# EAGLE board latchbox-lite (EAGLE 6.6.0)
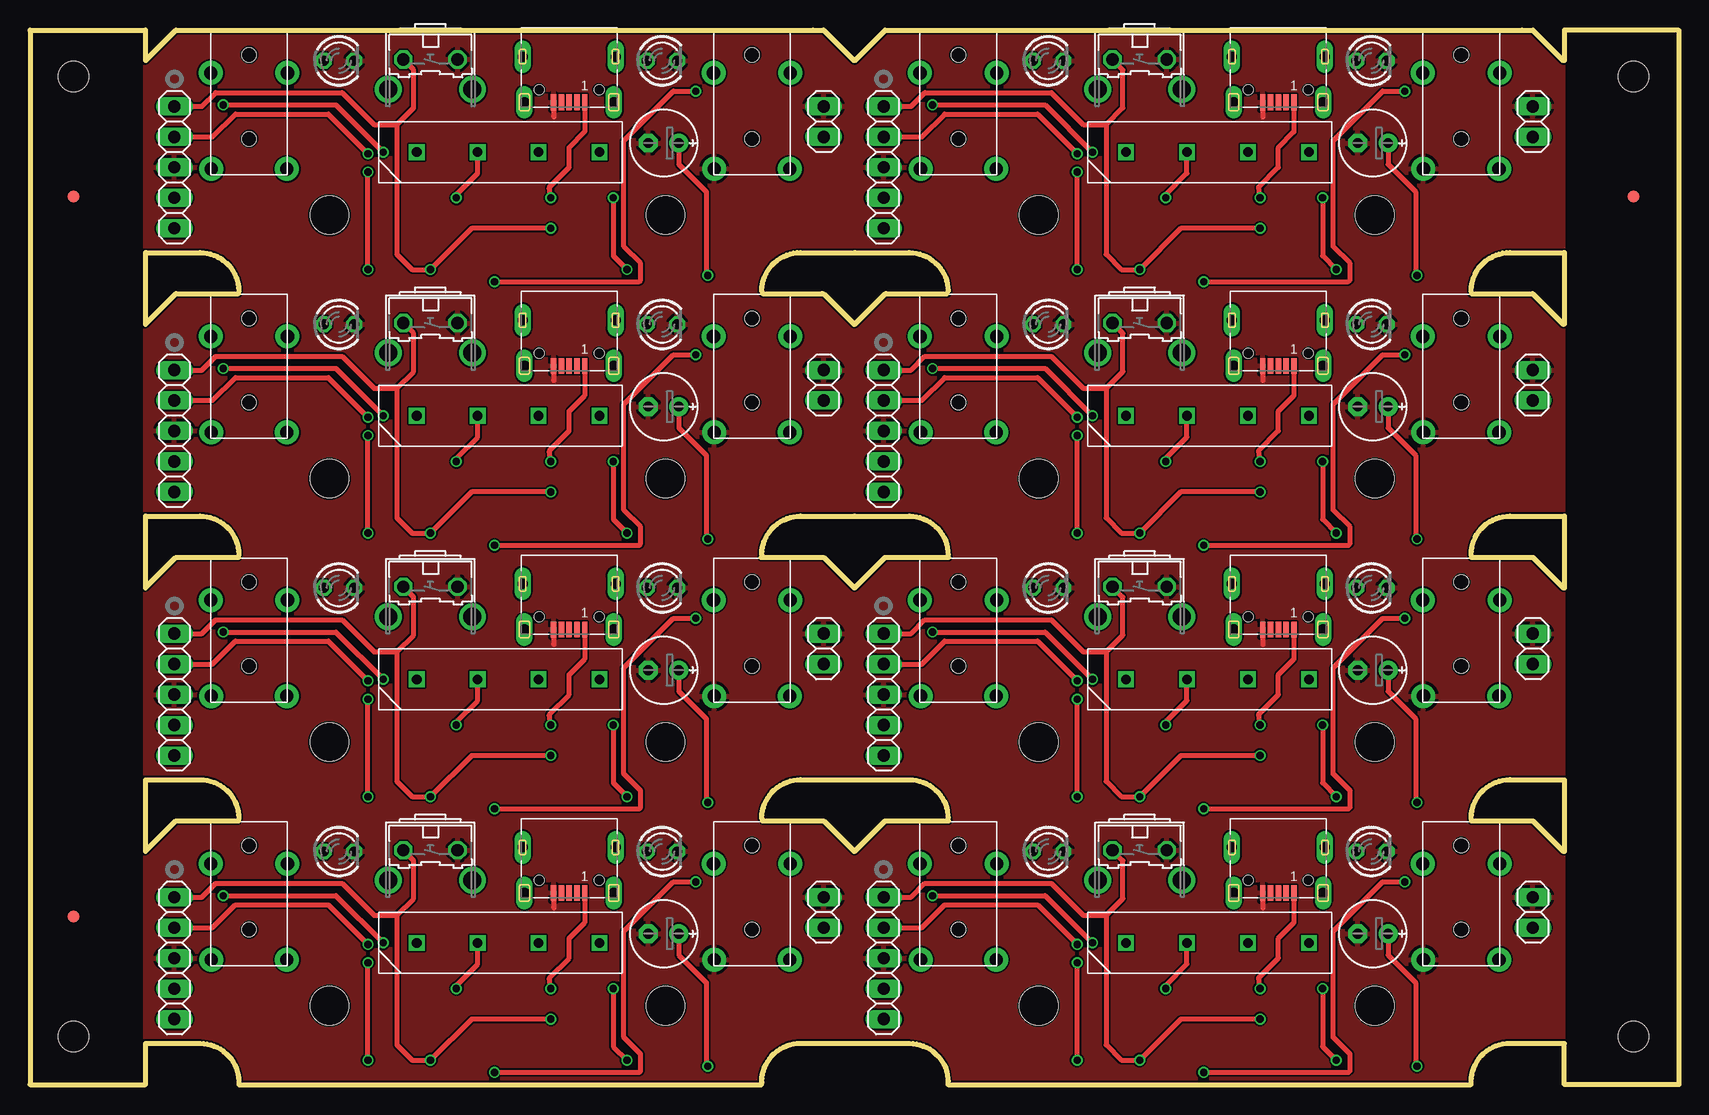
[diagram p0: board, top side]
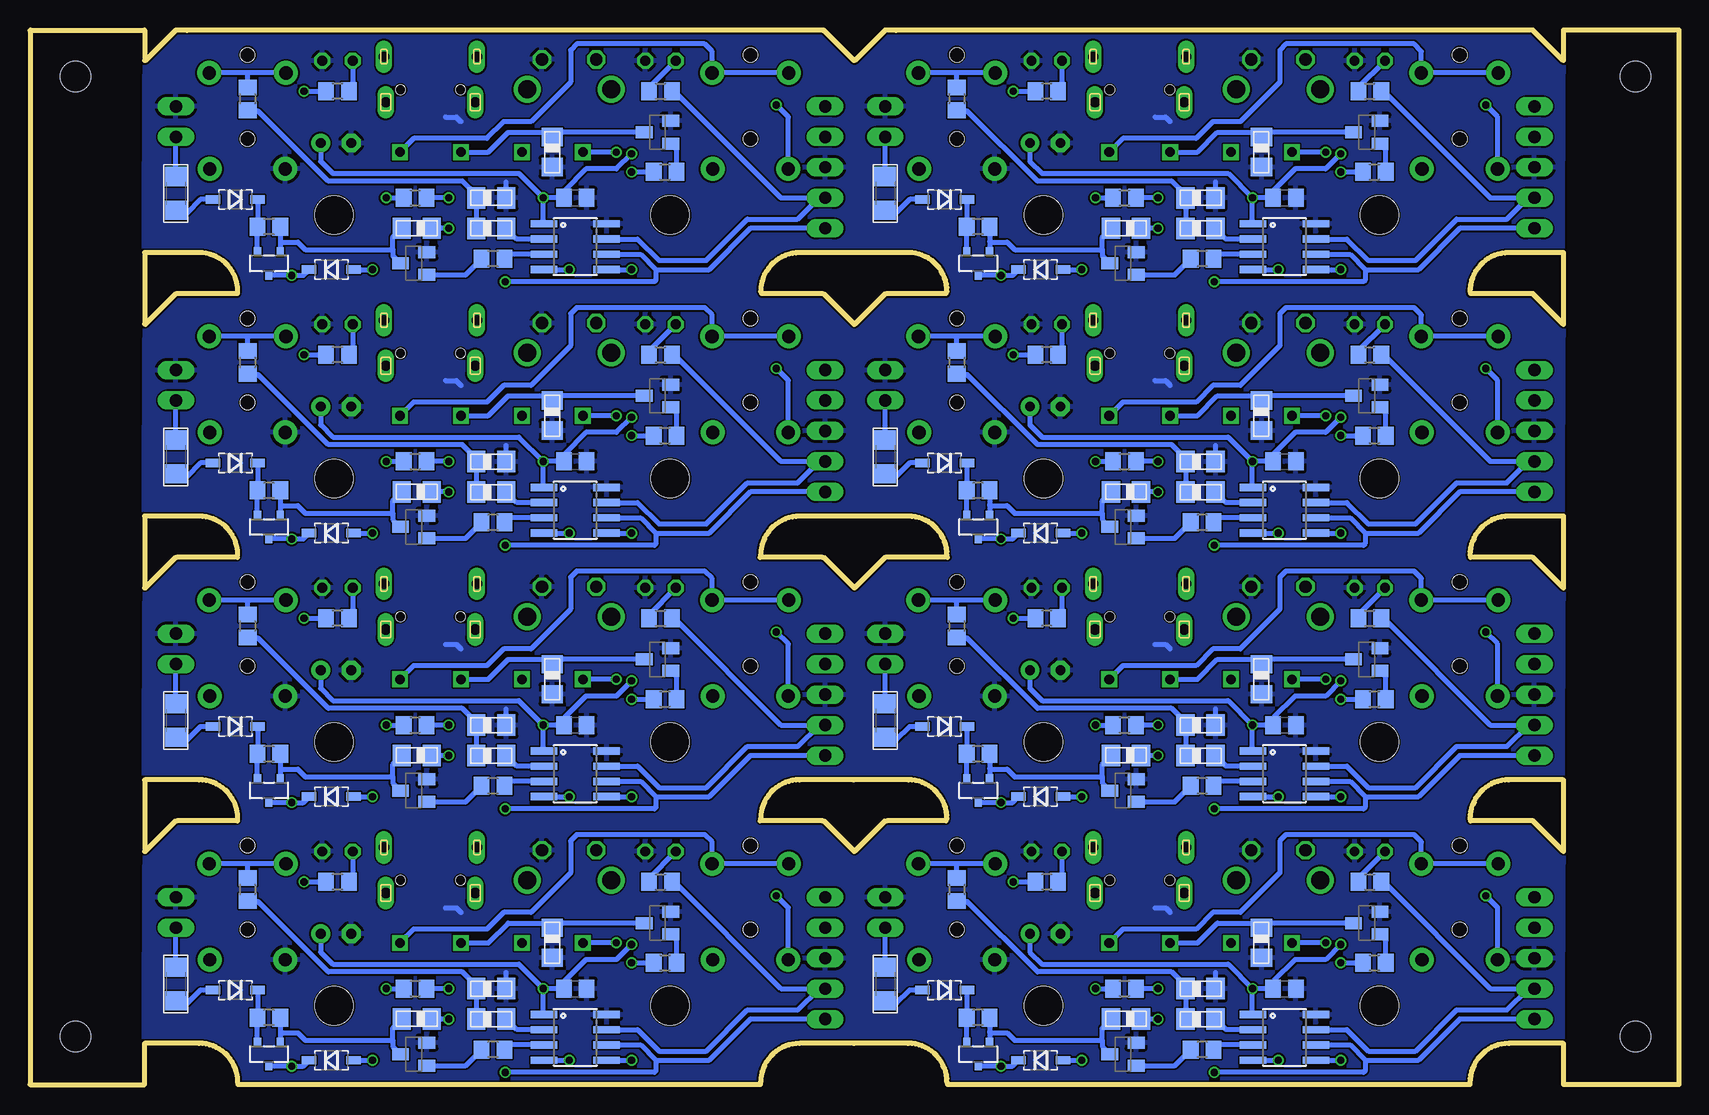
[diagram p1: board, bottom side, seen from below]

Size 137.4 x 87.88 mm. Coordinates in mm from the lower left corner, seen from the top.
Outline: 17.41,0 60.96,0
Outline: 9.65,3.43 14.16,3.43
Outline: 64.21,3.43 68.72,3.43
Outline: 14.18,3.43 arc-90 17.41,0.2 17.41,0.18
Outline: 60.99,0.18 60.99,0.21 arc-90 64.22,3.44
Outline: 66.14,21.97 68.68,19.43
Outline: 9.65,25.4 14.16,25.4
Outline: 64.21,25.4 68.72,25.4
Outline: 14.18,25.4 arc-90 17.41,22.17 17.41,22.15
Outline: 60.99,22.15 60.99,22.18 arc-90 64.22,25.41
Outline: 66.14,43.94 68.68,41.4
Outline: 9.62,41.4 12.16,43.94
Outline: 9.65,47.36 14.16,47.36
Outline: 64.21,47.36 68.72,47.36
Outline: 14.18,47.36 arc-90 17.41,44.13 17.41,44.11
Outline: 60.99,44.11 60.99,44.14 arc-90 64.22,47.37
Outline: 66.14,65.9 68.68,63.36
Outline: 9.62,63.36 12.16,65.9
Outline: 12.2,87.86 65.21,87.86
Outline: 9.65,69.33 14.16,69.33
Outline: 64.21,69.33 68.72,69.33
Outline: 14.18,69.33 arc-90 17.41,66.1 17.41,66.08
Outline: 60.99,66.08 60.99,66.11 arc-90 64.22,69.34
Outline: 65.25,87.86 66.14,87.86 68.68,85.32
Outline: 9.62,85.32 12.16,87.86
Outline: 76.52,0 120.07,0
Outline: 68.76,3.43 73.27,3.43
Outline: 123.32,3.43 127.83,3.43
Outline: 73.28,3.43 arc-90 76.51,0.2 76.51,0.18
Outline: 120.09,0.18 120.09,0.21 arc-90 123.32,3.44
Outline: 125.24,21.97 127.78,19.43
Outline: 68.73,19.43 71.27,21.97
Outline: 68.76,25.4 73.27,25.4
Outline: 123.32,25.4 127.83,25.4
Outline: 73.28,25.4 arc-90 76.51,22.17 76.51,22.15
Outline: 120.09,22.15 120.09,22.18 arc-90 123.32,25.41
Outline: 125.24,43.94 127.78,41.4
Outline: 68.73,41.4 71.27,43.94
Outline: 68.76,47.36 73.27,47.36
Outline: 123.32,47.36 127.83,47.36
Outline: 73.28,47.36 arc-90 76.51,44.13 76.51,44.11
Outline: 120.09,44.11 120.09,44.14 arc-90 123.32,47.37
Outline: 125.24,65.9 127.78,63.36
Outline: 68.73,63.36 71.27,65.9
Outline: 71.31,87.86 124.32,87.86
Outline: 68.76,69.33 73.27,69.33
Outline: 123.32,69.33 127.83,69.33
Outline: 73.28,69.33 arc-90 76.51,66.1 76.51,66.08
Outline: 120.09,66.08 120.09,66.11 arc-90 123.32,69.34
Outline: 124.35,87.86 125.24,87.86 127.78,85.32
Outline: 68.73,85.32 71.27,87.86
Outline: 61.05,65.91 66.01,65.91
Outline: 71.34,65.91 76.42,65.91
Outline: 120.11,65.91 125.19,65.91
Outline: 60.93,43.94 66.14,43.94
Outline: 71.34,43.94 76.55,43.94
Outline: 61.05,21.97 66.01,21.97
Outline: 71.34,21.97 76.55,21.97
Outline: 12.16,65.91 17.37,65.91
Outline: 12.16,43.94 17.37,43.94
Outline: 17.37,21.97 12.16,21.97 9.62,19.43 9.62,25.4
Outline: 120.11,21.97 125.19,21.97
Outline: 120.11,43.94 125.19,43.94
Outline: 0,87.86 0,0 9.62,0 9.62,3.43
Outline: 137.4,87.86 137.4,0
Outline: 9.62,47.37 9.62,41.4
Outline: 9.62,69.34 9.62,63.37
Outline: 0,87.88 9.62,87.88 9.62,85.34
Outline: 137.35,87.88 127.86,87.88 127.86,85.34
Outline: 127.86,69.34 127.86,63.37
Outline: 127.86,47.37 127.86,41.4
Outline: 127.86,25.4 127.86,19.43
Outline: 137.38,0 127.86,0 127.86,3.43
Copper layers (1*16): Top 0.035mm / dielectric 1.5mm / Bottom 0.035mm
Design rules "hackvana": minimum track width 6mil, minimum drill 0.3mm, track to track 6mil, track to pad 9mil, pad to pad 6mil, via to via 6mil, smd to smd 0mil, copper to edge 6mil, drill to drill 6mil, minimum pad ring 10mil, minimum via ring 6mil, stop-mask expansion 2mil, vias tented up to drill 100mil, thermal gap 10mil
Holes 3.2 mm at 24.96,6.57 52.96,6.57 24.96,28.54 52.96,28.54 24.96,50.5 52.96,50.5 24.96,72.46 52.96,72.46 84.06,6.57 112.06,6.57 84.06,28.54 112.06,28.54 84.06,50.5 112.06,50.5 84.06,72.46 112.06,72.46
Holes 2.54 mm at 3.62,84 133.62,84 3.62,4 133.62,4

## Footprints (pad centres in the part's own frame; a part is rotated, then mirrored left to right if it is on the bottom)
1X02 = drill 1.016 long: 1 -1.27,0; 2 1.27,0
C0805 = smd 1.3 x 1.5: 1 -0.95,0; 2 0.95,0
E2,5-6E = drill 0.813 pad 1.575: + -1.27,0 | drill 0.813 pad 1.575 octagon: - 1.27,0
SOD-123 = smd 1.2 x 0.7: A 1.85,0; C -1.85,0
0805DIODE = smd 1.524 x 1.778: A -1.262,-0.005; C 1.238,-0.005
FIDUCIAL_1MM = smd 1 x 1: 1 0,0
1206 = smd 1.6 x 1.8: 1 -1.4,0; 2 1.4,0
SO08 = smd 0.61 x 2.21: 1 -1.905,-2.616; 2 -0.635,-2.616; 3 0.635,-2.616; 4 1.905,-2.616; 5 1.905,2.616; 6 0.635,2.616; 7 -0.635,2.616; 8 -1.905,2.616
1X05 = drill 1.016 long: 1 -5.08,0; 2 -2.54,0; 3 0,0; 4 2.54,0; 5 5.08,0
3_5MM_PTH_MICRO = drill 1.1 pad 2: 1 -3.15,-8; 2 -3.2,0; 2A 3.2,0; 3 3.15,-8 | hole 1.2: 0,1.5; 0,-5.5
LED3MM = drill 0.813 octagon: A -1.27,0; K 1.27,0
SOT23-R = smd 0.6 x 0.7: 1 -0.95,-1; 2 0.95,-1; 3 0,1
SOT23-BEC = smd 1 x 1.4: B -0.95,-1.1; C 0,1.1; E 0.95,-1.1
R0805 = smd 1.3 x 1.5: 1 -0.95,0; 2 0.95,0
9007-REED-RELAY = drill 0.8 square: P$1 0,7.62; P$2 0,2.54; P$3 0,-2.54; P$4 0,-7.62
B3F-31XX = drill 1.016 octagon: 1 -2.261,-1.245; 2 2.261,-1.245 | drill 1.499 pad 2.159: 3 -3.505,1.245; 4 3.505,1.245
629105150521 = smd 0.45 x 1.3: 1 -1.3,1.05; 2 -0.65,1.05; 3 0,1.05; 4 0.65,1.05; 5 1.3,1.05 | drill 0.85 pad 1.2 long: SHELL -3.725,1.05; SHELL1 3.725,1.05; SHELL2 -3.875,-2.75; SHELL3 3.875,-2.75 | hole 0.8: -2.5,0; 2.5,0

## Placement (x,y rotation side)
BATT  [1X02]  66.14,14.35 270 top
BATT1  [1X02]  66.14,36.32 270 top
BATT2  [1X02]  66.14,58.28 270 top
BATT3  [1X02]  66.14,80.24 270 top
BATT4  [1X02]  125.24,14.35 270 top
BATT5  [1X02]  125.24,36.32 270 top
BATT6  [1X02]  125.24,58.28 270 top
BATT7  [1X02]  125.24,80.24 270 top
C1  [C0805]  32.86,8 0 bottom
C2  4u7  [E2,5-6E]  52.8,12.57 180 top
C3  [C0805]  32.86,29.97 0 bottom
C4  4u7  [E2,5-6E]  52.8,34.54 180 top
C5  [C0805]  32.86,51.93 0 bottom
C6  4u7  [E2,5-6E]  52.8,56.5 180 top
C7  [C0805]  32.86,73.89 0 bottom
C8  4u7  [E2,5-6E]  52.8,78.47 180 top
C9  [C0805]  91.97,8 0 bottom
C10  4u7  [E2,5-6E]  111.91,12.57 180 top
C11  [C0805]  91.97,29.97 0 bottom
C12  4u7  [E2,5-6E]  111.91,34.54 180 top
C13  [C0805]  91.97,51.93 0 bottom
C14  4u7  [E2,5-6E]  111.91,56.5 180 top
C15  [C0805]  91.97,73.89 0 bottom
C16  4u7  [E2,5-6E]  111.91,78.47 180 top
D1  [SOD-123]  61.18,7.87 180 bottom
D2  [SOD-123]  53.18,2.03 0 bottom
D3  0805DIODE  [0805DIODE]  46.07,5.46 180 bottom
D4  0805DIODE  [0805DIODE]  39.85,5.46 0 bottom
D5  0805DIODE  [0805DIODE]  39.85,8 0 bottom
D6  0805DIODE  [0805DIODE]  34.77,11.81 270 bottom
D7  0805DIODE  [0805DIODE]  39.85,29.97 0 bottom
D8  0805DIODE  [0805DIODE]  34.77,33.78 270 bottom
D9  [SOD-123]  61.18,29.84 180 bottom
D10  0805DIODE  [0805DIODE]  39.85,27.43 0 bottom
D11  [SOD-123]  53.18,24 0 bottom
D12  0805DIODE  [0805DIODE]  46.07,27.43 180 bottom
D13  0805DIODE  [0805DIODE]  39.85,51.93 0 bottom
D14  0805DIODE  [0805DIODE]  34.77,55.74 270 bottom
D15  [SOD-123]  61.18,51.8 180 bottom
D16  0805DIODE  [0805DIODE]  39.85,49.39 0 bottom
D17  [SOD-123]  53.18,45.96 0 bottom
D18  0805DIODE  [0805DIODE]  46.07,49.39 180 bottom
D19  0805DIODE  [0805DIODE]  39.85,73.89 0 bottom
D20  0805DIODE  [0805DIODE]  34.77,77.7 270 bottom
D21  [SOD-123]  61.18,73.77 180 bottom
D22  0805DIODE  [0805DIODE]  39.85,71.35 0 bottom
D23  [SOD-123]  53.18,67.93 0 bottom
D24  0805DIODE  [0805DIODE]  46.07,71.35 180 bottom
D25  0805DIODE  [0805DIODE]  98.95,8 0 bottom
D26  0805DIODE  [0805DIODE]  93.87,11.81 270 bottom
D27  [SOD-123]  120.29,7.87 180 bottom
D28  0805DIODE  [0805DIODE]  98.95,5.46 0 bottom
D29  [SOD-123]  112.29,2.03 0 bottom
D30  0805DIODE  [0805DIODE]  105.17,5.46 180 bottom
D31  0805DIODE  [0805DIODE]  98.95,29.97 0 bottom
D32  0805DIODE  [0805DIODE]  93.87,33.78 270 bottom
D33  [SOD-123]  120.29,29.84 180 bottom
D34  0805DIODE  [0805DIODE]  98.95,27.43 0 bottom
D35  [SOD-123]  112.29,24 0 bottom
D36  0805DIODE  [0805DIODE]  105.17,27.43 180 bottom
D37  0805DIODE  [0805DIODE]  98.95,51.93 0 bottom
D38  0805DIODE  [0805DIODE]  93.87,55.74 270 bottom
D39  [SOD-123]  120.29,51.8 180 bottom
D40  0805DIODE  [0805DIODE]  98.95,49.39 0 bottom
D41  [SOD-123]  112.29,45.96 0 bottom
D42  0805DIODE  [0805DIODE]  105.17,49.39 180 bottom
D43  0805DIODE  [0805DIODE]  98.95,73.89 0 bottom
D44  0805DIODE  [0805DIODE]  93.87,77.7 270 bottom
D45  [SOD-123]  120.29,73.77 180 bottom
D46  0805DIODE  [0805DIODE]  98.95,71.35 0 bottom
D47  [SOD-123]  112.29,67.93 0 bottom
D48  0805DIODE  [0805DIODE]  105.17,71.35 180 bottom
E$1  [FIDUCIAL_1MM]  3.62,74 0 top
E$2  [FIDUCIAL_1MM]  3.62,14 0 top
E$3  [FIDUCIAL_1MM]  133.62,74 0 top
F1  [1206]  66.14,8.38 270 bottom
F2  [1206]  66.14,30.35 270 bottom
F3  [1206]  66.14,52.31 270 bottom
F4  [1206]  66.14,74.28 270 bottom
F5  [1206]  125.24,8.38 270 bottom
F6  [1206]  125.24,30.35 270 bottom
F7  [1206]  125.24,52.31 270 bottom
F8  [1206]  125.24,74.28 270 bottom
IC1  PIC12F1822SO08  [SO08]  32.86,3.94 270 bottom
IC2  PIC12F1822SO08  [SO08]  32.86,25.9 270 bottom
IC3  PIC12F1822SO08  [SO08]  32.86,47.87 270 bottom
IC4  PIC12F1822SO08  [SO08]  32.86,69.83 270 bottom
IC5  PIC12F1822SO08  [SO08]  91.97,3.94 270 bottom
IC6  PIC12F1822SO08  [SO08]  91.97,25.9 270 bottom
IC7  PIC12F1822SO08  [SO08]  91.97,47.87 270 bottom
IC8  PIC12F1822SO08  [SO08]  91.97,69.83 270 bottom
ICSP  [1X05]  12.03,10.54 270 top
ICSP1  [1X05]  12.03,32.51 270 top
ICSP2  [1X05]  12.03,54.47 270 top
ICSP3  [1X05]  12.03,76.43 270 top
ICSP4  [1X05]  71.14,10.54 270 top
ICSP5  [1X05]  71.14,32.51 270 top
ICSP6  [1X05]  71.14,54.47 270 top
ICSP7  [1X05]  71.14,76.43 270 top
IN  3_5MM_PTH_MICRO  [3_5MM_PTH_MICRO]  60.17,18.41 0 top
IN1  3_5MM_PTH_MICRO  [3_5MM_PTH_MICRO]  60.17,40.38 0 top
IN2  3_5MM_PTH_MICRO  [3_5MM_PTH_MICRO]  60.17,62.34 0 top
IN3  3_5MM_PTH_MICRO  [3_5MM_PTH_MICRO]  60.17,84.31 0 top
IN4  3_5MM_PTH_MICRO  [3_5MM_PTH_MICRO]  119.27,18.41 0 top
IN5  3_5MM_PTH_MICRO  [3_5MM_PTH_MICRO]  119.27,40.38 0 top
IN6  3_5MM_PTH_MICRO  [3_5MM_PTH_MICRO]  119.27,62.34 0 top
IN7  3_5MM_PTH_MICRO  [3_5MM_PTH_MICRO]  119.27,84.31 0 top
LED1  [LED3MM]  25.75,19.43 0 top
LED2  [LED3MM]  52.67,19.43 0 top
LED3  [LED3MM]  52.67,41.4 0 top
LED4  [LED3MM]  25.75,41.4 0 top
LED5  [LED3MM]  52.67,63.36 0 top
LED6  [LED3MM]  25.75,63.36 0 top
LED7  [LED3MM]  52.67,85.32 0 top
LED8  [LED3MM]  25.75,85.32 0 top
LED9  [LED3MM]  111.78,19.43 0 top
LED10  [LED3MM]  84.85,19.43 0 top
LED11  [LED3MM]  111.78,41.4 0 top
LED12  [LED3MM]  84.85,41.4 0 top
LED13  [LED3MM]  111.78,63.36 0 top
LED14  [LED3MM]  84.85,63.36 0 top
LED15  [LED3MM]  111.78,85.32 0 top
LED16  [LED3MM]  84.85,85.32 0 top
OUT  3_5MM_PTH_MICRO  [3_5MM_PTH_MICRO]  18.26,18.41 0 top
OUT1  3_5MM_PTH_MICRO  [3_5MM_PTH_MICRO]  18.26,40.38 0 top
OUT2  3_5MM_PTH_MICRO  [3_5MM_PTH_MICRO]  18.26,62.34 0 top
OUT3  3_5MM_PTH_MICRO  [3_5MM_PTH_MICRO]  18.26,84.31 0 top
OUT4  3_5MM_PTH_MICRO  [3_5MM_PTH_MICRO]  77.36,18.41 0 top
OUT5  3_5MM_PTH_MICRO  [3_5MM_PTH_MICRO]  77.36,40.38 0 top
OUT6  3_5MM_PTH_MICRO  [3_5MM_PTH_MICRO]  77.36,62.34 0 top
OUT7  3_5MM_PTH_MICRO  [3_5MM_PTH_MICRO]  77.36,84.31 0 top
Q1  [SOT23-R]  58.39,2.54 180 bottom
Q2  [SOT23-BEC]  26,13.46 90 bottom
Q3  [SOT23-BEC]  46.32,2.54 90 bottom
Q4  [SOT23-R]  58.39,24.5 180 bottom
Q5  [SOT23-BEC]  26,35.43 90 bottom
Q6  [SOT23-BEC]  46.32,24.5 90 bottom
Q7  [SOT23-R]  58.39,46.47 180 bottom
Q8  [SOT23-BEC]  26,57.39 90 bottom
Q9  [SOT23-BEC]  46.32,46.47 90 bottom
Q10  [SOT23-R]  58.39,68.43 180 bottom
Q11  [SOT23-BEC]  26,79.36 90 bottom
Q12  [SOT23-BEC]  46.32,68.43 90 bottom
Q13  [SOT23-R]  117.49,2.54 180 bottom
Q14  [SOT23-BEC]  85.11,13.46 90 bottom
Q15  [SOT23-BEC]  105.43,2.54 90 bottom
Q16  [SOT23-R]  117.49,24.5 180 bottom
Q17  [SOT23-BEC]  85.11,35.43 90 bottom
Q18  [SOT23-BEC]  105.43,24.5 90 bottom
Q19  [SOT23-R]  117.49,46.47 180 bottom
Q20  [SOT23-BEC]  85.11,57.39 90 bottom
Q21  [SOT23-BEC]  105.43,46.47 90 bottom
Q22  [SOT23-R]  117.49,68.43 180 bottom
Q23  [SOT23-BEC]  85.11,79.36 90 bottom
Q24  [SOT23-BEC]  105.43,68.43 90 bottom
R1  100r  [R0805]  60.17,16.26 270 bottom
R2  1k  [R0805]  52.67,16.89 180 bottom
R3  10k  [R0805]  58.39,5.59 180 bottom
R4  4r7  [R0805]  46.2,8 0 bottom
R5  1k  [R0805]  25.37,10.16 0 bottom
R6  1k  [R0805]  25.75,16.89 0 bottom
R7  1k  [R0805]  39.72,2.92 180 bottom
R8  100r  [R0805]  60.17,38.22 270 bottom
R9  1k  [R0805]  25.37,32.12 0 bottom
R10  10k  [R0805]  58.39,27.55 180 bottom
R11  1k  [R0805]  25.75,38.86 0 bottom
R12  1k  [R0805]  52.67,38.86 180 bottom
R13  4r7  [R0805]  46.2,29.97 0 bottom
R14  1k  [R0805]  39.72,24.89 180 bottom
R15  100r  [R0805]  60.17,60.18 270 bottom
R16  1k  [R0805]  25.37,54.09 0 bottom
R17  10k  [R0805]  58.39,49.52 180 bottom
R18  1k  [R0805]  25.75,60.82 0 bottom
R19  1k  [R0805]  52.67,60.82 180 bottom
R20  4r7  [R0805]  46.2,51.93 0 bottom
R21  1k  [R0805]  39.72,46.85 180 bottom
R22  100r  [R0805]  60.17,82.15 270 bottom
R23  1k  [R0805]  25.37,76.05 0 bottom
R24  10k  [R0805]  58.39,71.48 180 bottom
R25  1k  [R0805]  25.75,82.78 0 bottom
R26  1k  [R0805]  52.67,82.78 180 bottom
R27  4r7  [R0805]  46.2,73.89 0 bottom
R28  1k  [R0805]  39.72,68.81 180 bottom
R29  100r  [R0805]  119.27,16.26 270 bottom
R30  1k  [R0805]  84.47,10.16 0 bottom
R31  10k  [R0805]  117.49,5.59 180 bottom
R32  1k  [R0805]  84.85,16.89 0 bottom
R33  1k  [R0805]  111.78,16.89 180 bottom
R34  4r7  [R0805]  105.3,8 0 bottom
R35  1k  [R0805]  98.82,2.92 180 bottom
R36  100r  [R0805]  119.27,38.22 270 bottom
R37  1k  [R0805]  84.47,32.12 0 bottom
R38  10k  [R0805]  117.49,27.55 180 bottom
R39  1k  [R0805]  84.85,38.86 0 bottom
R40  1k  [R0805]  111.78,38.86 180 bottom
R41  4r7  [R0805]  105.3,29.97 0 bottom
R42  1k  [R0805]  98.82,24.89 180 bottom
R43  100r  [R0805]  119.27,60.18 270 bottom
R44  1k  [R0805]  84.47,54.09 0 bottom
R45  10k  [R0805]  117.49,49.52 180 bottom
R46  1k  [R0805]  84.85,60.82 0 bottom
R47  1k  [R0805]  111.78,60.82 180 bottom
R48  4r7  [R0805]  105.3,51.93 0 bottom
R49  1k  [R0805]  98.82,46.85 180 bottom
R50  100r  [R0805]  119.27,82.15 270 bottom
R51  1k  [R0805]  84.47,76.05 0 bottom
R52  10k  [R0805]  117.49,71.48 180 bottom
R53  1k  [R0805]  84.85,82.78 0 bottom
R54  1k  [R0805]  111.78,82.78 180 bottom
R55  4r7  [R0805]  105.3,73.89 0 bottom
R56  1k  [R0805]  98.82,68.81 180 bottom
RLY1  9007-REED-RELAY  [9007-REED-RELAY]  39.85,11.81 90 top
RLY2  9007-REED-RELAY  [9007-REED-RELAY]  39.85,33.78 90 top
RLY3  9007-REED-RELAY  [9007-REED-RELAY]  39.85,55.74 90 top
RLY4  9007-REED-RELAY  [9007-REED-RELAY]  39.85,77.7 90 top
RLY5  9007-REED-RELAY  [9007-REED-RELAY]  98.95,11.81 90 top
RLY6  9007-REED-RELAY  [9007-REED-RELAY]  98.95,33.78 90 top
RLY7  9007-REED-RELAY  [9007-REED-RELAY]  98.95,55.74 90 top
RLY8  9007-REED-RELAY  [9007-REED-RELAY]  98.95,77.7 90 top
S1  [B3F-31XX]  33.37,18.29 180 top
S2  [B3F-31XX]  33.37,40.25 180 top
S3  [B3F-31XX]  33.37,62.22 180 top
S4  [B3F-31XX]  33.37,84.18 180 top
S5  [B3F-31XX]  92.47,18.29 180 top
S6  [B3F-31XX]  92.47,40.25 180 top
S7  [B3F-31XX]  92.47,62.22 180 top
S8  [B3F-31XX]  92.47,84.18 180 top
USB  [629105150521]  44.93,17.02 180 top
USB1  [629105150521]  44.93,38.98 180 top
USB2  [629105150521]  44.93,60.95 180 top
USB3  [629105150521]  44.93,82.91 180 top
USB4  [629105150521]  104.03,17.02 180 top
USB5  [629105150521]  104.03,38.98 180 top
USB6  [629105150521]  104.03,60.95 180 top
USB7  [629105150521]  104.03,82.91 180 top

## Library data of the parts
BATT BATT1-BATT7 ICSP ICSP1-ICSP7 = pinhead
C1-C16 R1-R56 = rcl
D1 D2 D9 D11 D15 D17 D21 D23 D27 D29 D33 D35 D39 D41 D45 D47 F1-F8 Q1 Q4 Q7 Q10 Q13 Q16 Q19 Q22 = microbuilder
D3-D8 D10 D12-D14 D16 D18-D20 D22 D24-D26 D28 D30-D32 D34 D36-D38 D40 D42-D44 D46 D48 IC1-IC8 = jasons_stuff
E$1-E$3 = adafruit
IN IN1-IN7 OUT OUT1-OUT7 RLY1-RLY8 USB USB1-USB7 = jason_eagle6
LED1-LED16 = led
Q2 Q3 Q5 Q6 Q8 Q9 Q11 Q12 Q14 Q15 Q17 Q18 Q20 Q21 Q23 Q24 = transistor
S1-S8 = switch-omron; MPN: B3F-3100; OC_FARNELL: 959704; OC_NEWARK: 36M3582

## Nets
GND: BATT.1 C1.2 C2.- D5.C D6.C IC1.8 ICSP.3 IN.1 LED1.K LED2.K Q2.E Q3.E S1.1 USB.5
GND1: BATT1.1 C3.2 C4.- D7.C D8.C IC2.8 ICSP1.3 IN1.1 LED3.K LED4.K Q5.E Q6.E S2.1 USB1.5
GND2: BATT2.1 C5.2 C6.- D13.C D14.C IC3.8 ICSP2.3 IN2.1 LED5.K LED6.K Q8.E Q9.E S3.1 USB2.5
GND3: BATT3.1 C7.2 C8.- D19.C D20.C IC4.8 ICSP3.3 IN3.1 LED7.K LED8.K Q11.E Q12.E S4.1 USB3.5
GND4: BATT4.1 C9.2 C10.- D25.C D26.C IC5.8 ICSP4.3 IN4.1 LED9.K LED10.K Q14.E Q15.E S5.1 USB4.5
GND5: BATT5.1 C11.2 C12.- D31.C D32.C IC6.8 ICSP5.3 IN5.1 LED11.K LED12.K Q17.E Q18.E S6.1 USB5.5
GND6: BATT6.1 C13.2 C14.- D37.C D38.C IC7.8 ICSP6.3 IN6.1 LED13.K LED14.K Q20.E Q21.E S7.1 USB6.5
GND7: BATT7.1 C15.2 C16.- D43.C D44.C IC8.8 ICSP7.3 IN7.1 LED15.K LED16.K Q23.E Q24.E S8.1 USB7.5
INPUT: D4.C IC1.2
INPUT1: D10.C IC2.2
INPUT2: D16.C IC3.2
INPUT3: D22.C IC4.2
INPUT4: D28.C IC5.2
INPUT5: D34.C IC6.2
INPUT6: D40.C IC7.2
INPUT7: D46.C IC8.2
N$1: IN.2 IN.2A R1.1
N$2: D3.C Q1.1 Q3.C R3.1
N$3: LED2.A R2.1
N$4: D1.C Q1.2 R3.2
N$5: BATT.2 F1.1
N$6: Q2.B R5.2
N$7: OUT.2 OUT.2A RLY1.P$4
N$8: OUT.1 RLY1.P$1
N$9: D6.A Q2.C RLY1.P$3
N$10: LED1.A R6.1
N$11: IC1.7 ICSP.4 R6.2
N$12: IC1.6 ICSP.5 R2.2
N$13: Q3.B R7.2
N$14: D3.A IC1.4 ICSP.1 S1.2
N$15: D1.A F1.2
N$16: R4.2 USB.1
N$17: IN1.2 IN1.2A R8.1
N$18: D9.C Q4.2 R10.2
N$19: BATT1.2 F2.1
N$20: OUT1.2 OUT1.2A RLY2.P$4
N$21: OUT1.1 RLY2.P$1
N$22: D8.A Q5.C RLY2.P$3
N$23: D12.A IC2.4 ICSP1.1 S2.2
N$24: IC2.7 ICSP1.4 R11.2
N$25: IC2.6 ICSP1.5 R12.2
N$26: LED3.A R12.1
N$27: Q5.B R9.2
N$28: D9.A F2.2
N$29: R13.2 USB1.1
N$30: LED4.A R11.1
N$31: D12.C Q4.1 Q6.C R10.1
N$32: Q6.B R14.2
N$33: IN2.2 IN2.2A R15.1
N$34: D15.C Q7.2 R17.2
N$35: BATT2.2 F3.1
N$36: OUT2.2 OUT2.2A RLY3.P$4
N$37: OUT2.1 RLY3.P$1
N$38: D14.A Q8.C RLY3.P$3
N$39: D18.A IC3.4 ICSP2.1 S3.2
N$40: IC3.7 ICSP2.4 R18.2
N$41: IC3.6 ICSP2.5 R19.2
N$42: LED5.A R19.1
N$43: Q8.B R16.2
N$44: D15.A F3.2
N$45: R20.2 USB2.1
N$46: LED6.A R18.1
N$47: D18.C Q7.1 Q9.C R17.1
N$48: Q9.B R21.2
N$49: IN3.2 IN3.2A R22.1
N$50: D21.C Q10.2 R24.2
N$51: BATT3.2 F4.1
N$52: OUT3.2 OUT3.2A RLY4.P$4
N$53: OUT3.1 RLY4.P$1
N$54: D20.A Q11.C RLY4.P$3
N$55: D24.A IC4.4 ICSP3.1 S4.2
N$56: IC4.7 ICSP3.4 R25.2
N$57: IC4.6 ICSP3.5 R26.2
N$58: LED7.A R26.1
N$59: Q11.B R23.2
N$60: D21.A F4.2
N$61: R27.2 USB3.1
N$62: LED8.A R25.1
N$63: D24.C Q10.1 Q12.C R24.1
N$64: Q12.B R28.2
N$65: IN4.2 IN4.2A R29.1
N$66: D27.C Q13.2 R31.2
N$67: BATT4.2 F5.1
N$68: OUT4.2 OUT4.2A RLY5.P$4
N$69: OUT4.1 RLY5.P$1
N$70: D26.A Q14.C RLY5.P$3
N$71: D30.A IC5.4 ICSP4.1 S5.2
N$72: IC5.7 ICSP4.4 R32.2
N$73: IC5.6 ICSP4.5 R33.2
N$74: LED9.A R33.1
N$75: Q14.B R30.2
N$76: D27.A F5.2
N$77: R34.2 USB4.1
N$78: LED10.A R32.1
N$79: D30.C Q13.1 Q15.C R31.1
N$80: Q15.B R35.2
N$81: IN5.2 IN5.2A R36.1
N$82: D33.C Q16.2 R38.2
N$83: BATT5.2 F6.1
N$84: OUT5.2 OUT5.2A RLY6.P$4
N$85: OUT5.1 RLY6.P$1
N$86: D32.A Q17.C RLY6.P$3
N$87: D36.A IC6.4 ICSP5.1 S6.2
N$88: IC6.7 ICSP5.4 R39.2
N$89: IC6.6 ICSP5.5 R40.2
N$90: LED11.A R40.1
N$91: Q17.B R37.2
N$92: D33.A F6.2
N$93: R41.2 USB5.1
N$94: LED12.A R39.1
N$95: D36.C Q16.1 Q18.C R38.1
N$96: Q18.B R42.2
N$97: IN6.2 IN6.2A R43.1
N$98: D39.C Q19.2 R45.2
N$99: BATT6.2 F7.1
N$100: OUT6.2 OUT6.2A RLY7.P$4
N$101: OUT6.1 RLY7.P$1
N$102: D38.A Q20.C RLY7.P$3
N$103: D42.A IC7.4 ICSP6.1 S7.2
N$104: IC7.7 ICSP6.4 R46.2
N$105: IC7.6 ICSP6.5 R47.2
N$106: LED13.A R47.1
N$107: Q20.B R44.2
N$108: D39.A F7.2
N$109: R48.2 USB6.1
N$110: LED14.A R46.1
N$111: D42.C Q19.1 Q21.C R45.1
N$112: Q21.B R49.2
N$113: IN7.2 IN7.2A R50.1
N$114: D45.C Q22.2 R52.2
N$115: BATT7.2 F8.1
N$116: OUT7.2 OUT7.2A RLY8.P$4
N$117: OUT7.1 RLY8.P$1
N$118: D44.A Q23.C RLY8.P$3
N$119: D48.A IC8.4 ICSP7.1 S8.2
N$120: IC8.7 ICSP7.4 R53.2
N$121: IC8.6 ICSP7.5 R54.2
N$122: LED15.A R54.1
N$123: Q23.B R51.2
N$124: D45.A F8.2
N$125: R55.2 USB7.1
N$126: LED16.A R53.1
N$127: D48.C Q22.1 Q24.C R52.1
N$128: Q24.B R56.2
OUTPUT: IC1.5 R5.1
OUTPUT1: IC2.5 R9.1
OUTPUT2: IC3.5 R16.1
OUTPUT3: IC4.5 R23.1
OUTPUT4: IC5.5 R30.1
OUTPUT5: IC6.5 R37.1
OUTPUT6: IC7.5 R44.1
OUTPUT7: IC8.5 R51.1
POWER_CTRL: IC1.3 R7.1
POWER_CTRL1: IC2.3 R14.1
POWER_CTRL2: IC3.3 R21.1
POWER_CTRL3: IC4.3 R28.1
POWER_CTRL4: IC5.3 R35.1
POWER_CTRL5: IC6.3 R42.1
POWER_CTRL6: IC7.3 R49.1
POWER_CTRL7: IC8.3 R56.1
USB_POWER: D2.A R4.1
USB_POWER1: D11.A R13.1
USB_POWER2: D17.A R20.1
USB_POWER3: D23.A R27.1
USB_POWER4: D29.A R34.1
USB_POWER5: D35.A R41.1
USB_POWER6: D41.A R48.1
USB_POWER7: D47.A R55.1
VCC: C1.1 C2.+ D2.C IC1.1 ICSP.2 Q1.3 RLY1.P$2
VCC1: C3.1 C4.+ D11.C IC2.1 ICSP1.2 Q4.3 RLY2.P$2
VCC2: C5.1 C6.+ D17.C IC3.1 ICSP2.2 Q7.3 RLY3.P$2
VCC3: C7.1 C8.+ D23.C IC4.1 ICSP3.2 Q10.3 RLY4.P$2
VCC4: C9.1 C10.+ D29.C IC5.1 ICSP4.2 Q13.3 RLY5.P$2
VCC5: C11.1 C12.+ D35.C IC6.1 ICSP5.2 Q16.3 RLY6.P$2
VCC6: C13.1 C14.+ D41.C IC7.1 ICSP6.2 Q19.3 RLY7.P$2
VCC7: C15.1 C16.+ D47.C IC8.1 ICSP7.2 Q22.3 RLY8.P$2
Z: D4.A D5.A R1.2
Z1: D7.A D10.A R8.2
Z2: D13.A D16.A R15.2
Z3: D19.A D22.A R22.2
Z4: D25.A D28.A R29.2
Z5: D31.A D34.A R36.2
Z6: D37.A D40.A R43.2
Z7: D43.A D46.A R50.2

## Tracks (layer width: path | path; a pad name or v marks a point on that pad's centre or on a via)
GND
  Top 0.406: USB.5 43.63,14.76 43.66,14.73
  Bottom 0.406: D5.C 38.61,9.33 | 43.66,14.73 42.77,14.73 42.39,14.35
  pour Bottom: 9.62,21.97 9.75,0.13 68.8,0.13 68.68,21.97
  pour Top: 9.62,21.97 9.62,0 68.68,0.13 68.68,21.97
GND1
  Top 0.406: USB1.5 43.63,36.73 43.66,36.7
  Bottom 0.406: D7.C 38.61,31.29 | 43.66,36.7 42.77,36.7 42.39,36.31
  pour Bottom: 9.62,43.94 9.75,22.09 68.8,22.09 68.68,43.94
  pour Top: 9.62,43.94 9.62,21.96 68.68,22.09 68.68,43.94
GND2
  Top 0.406: USB2.5 43.63,58.69 43.66,58.66
  Bottom 0.406: D13.C 38.61,53.26 | 43.66,58.66 42.77,58.66 42.39,58.28
  pour Bottom: 9.62,65.9 9.75,44.06 68.8,44.06 68.68,65.9
  pour Top: 9.62,65.9 9.62,43.93 68.68,44.06 68.68,65.9
GND3
  Top 0.406: USB3.5 43.63,80.66 43.66,80.62
  Bottom 0.406: D19.C 38.61,75.22 | 43.66,80.62 42.77,80.62 42.39,80.24
  pour Bottom: 9.62,87.86 9.75,66.02 68.8,66.02 68.68,87.86
  pour Top: 9.62,87.86 9.62,65.89 68.68,66.02 68.68,87.86
GND4
  Top 0.406: USB4.5 102.73,14.76 102.76,14.73
  Bottom 0.406: D25.C 97.71,9.33 | 102.76,14.73 101.87,14.73 101.49,14.35
  pour Bottom: 68.73,21.97 68.85,0.13 127.91,0.13 127.78,21.97
  pour Top: 68.73,21.97 68.73,0 127.78,0.13 127.78,21.97
GND5
  Top 0.406: USB5.5 102.73,36.73 102.76,36.7
  Bottom 0.406: D31.C 97.71,31.29 | 102.76,36.7 101.87,36.7 101.49,36.31
  pour Bottom: 68.73,43.94 68.85,22.09 127.91,22.09 127.78,43.94
  pour Top: 68.73,43.94 68.73,21.96 127.78,22.09 127.78,43.94
GND6
  Top 0.406: USB6.5 102.73,58.69 102.76,58.66
  Bottom 0.406: D37.C 97.71,53.26 | 102.76,58.66 101.87,58.66 101.49,58.28
  pour Bottom: 68.73,65.9 68.85,44.06 127.91,44.06 127.78,65.9
  pour Top: 68.73,65.9 68.73,43.93 127.78,44.06 127.78,65.9
GND7
  Top 0.406: USB7.5 102.73,80.66 102.76,80.62
  Bottom 0.406: D43.C 97.71,75.22 | 102.76,80.62 101.87,80.62 101.49,80.24
  pour Bottom: 68.73,87.86 68.85,66.02 127.91,66.02 127.78,87.86
  pour Top: 68.73,87.86 68.73,65.89 127.78,66.02 127.78,87.86
INPUT
  Bottom 0.406: IC1.2 37.72,4.57 D4.C
INPUT1
  Bottom 0.406: IC2.2 37.72,26.54 D10.C
INPUT2
  Bottom 0.406: IC3.2 37.72,48.5 D16.C
INPUT3
  Bottom 0.406: IC4.2 37.72,70.47 D22.C
INPUT4
  Bottom 0.406: IC5.2 96.83,4.57 D28.C
INPUT5
  Bottom 0.406: IC6.2 96.83,26.54 D34.C
INPUT6
  Bottom 0.406: IC7.2 96.83,48.5 D40.C
INPUT7
  Bottom 0.406: IC8.2 96.83,70.47 D46.C
N$1
  Bottom 0.406: IN.2 60.17,18.41 | 60.17,18.41 IN.2A | R1.1 60.17,18.41
N$2
  Bottom 0.406: 48.05,3.68 48.05,3.16 Q3.C | Q1.1 R3.1 57.44,4.38 57.37,4.32 55.97,4.32 55.34,3.68 48.05,3.68 | 48.05,3.68 48.05,4.73 D3.C
N$3
  Bottom 0.406: LED2.A 51.4,17.21 R2.1
N$4
  Bottom 0.406: Q1.2 R3.2 D1.C
N$5
  Bottom 0.406: F1.1 BATT.2
N$6
  Bottom 0.406: R5.2 24.42,12.03 Q2.B
N$7
  Bottom 0.406: OUT.2 OUT.2A 21.46,20.22 22.07,20.83 32.73,20.83 33.24,20.32 33.24,17.65 36.54,14.35 38.83,14.35 40.23,12.95 46.32,12.95 RLY1.P$4
N$8  (via drill 0.6)
  Top 0.406: v16.1,15.75 25.5,15.75 v29.43,11.81
  Bottom 0.406: OUT.1 15.11,14.76 v16.1,15.75 | v29.43,11.81 RLY1.P$1
N$9
  Bottom 0.406: Q2.C 34.38,13.46 | 34.38,13.46 D6.A | RLY1.P$3 40.1,11.81 38.45,13.46 34.38,13.46
N$10
  Bottom 0.406: R6.1 26.7,17.21 LED1.A
N$11
  Bottom 0.406: R6.2 24.61,16.89 15.72,8 ICSP.4 12.54,8 14.32,6.22 18.51,6.22 21.94,2.79 25.88,2.79 27.65,4.57 IC1.7
N$12  (via drill 0.6)
  Top 0.406: v38.7,1.02 50.77,1.02 50.89,1.14 50.89,2.54 49.5,3.94 49.5,12.77 R2.2 v55.47,16.89
  Bottom 0.406: ICSP.5 18.26,5.46 21.69,2.03 26.13,2.03 | IC1.6 27.4,3.3 26.13,2.03 | 26.13,2.03 26.13,1.14 26.26,1.02 v38.7,1.02 | v55.47,16.89 R2.2
N$13
  Bottom 0.406: Q3.B 42,1.59 R7.2
N$14  (via drill 0.6)
  Top 0.406: 30.57,14.1 31.97,15.49 31.97,18.67 S1.2 | 30.57,14.1 30.57,3.3 31.85,2.03 v33.37,2.03 36.8,5.46 v43.4,5.46 | ICSP.1 14.32,15.62 15.46,16.76 26,16.76 28.67,14.1 30.57,14.1
  Bottom 0.406: IC1.4 v33.37,2.03 | v43.4,5.46 D3.A
N$15
  Bottom 0.406: D1.A 64.1,7.87 65.25,6.73 65.88,6.73 F1.2
N$16  (via drill 0.6)
  Top 0.406: USB.1 46.23,13.49 44.93,12.19 44.93,10.54 43.27,8.89 v43.4,8
  Bottom 0.406: 45.43,8.19 R4.2 v43.4,8
N$17
  Bottom 0.406: IN1.2 60.17,40.38 | 60.17,40.38 IN1.2A | R8.1 60.17,40.38
N$18
  Bottom 0.406: Q4.2 R10.2 D9.C
N$19
  Bottom 0.406: F2.1 BATT1.2
N$20
  Bottom 0.406: OUT1.2 OUT1.2A 21.46,42.18 22.07,42.79 32.73,42.79 33.24,42.28 33.24,39.62 36.54,36.31 38.83,36.31 40.23,34.92 46.32,34.92 RLY2.P$4
N$21  (via drill 0.6)
  Top 0.406: v16.1,37.71 25.5,37.71 v29.43,33.77
  Bottom 0.406: OUT1.1 15.11,36.72 v16.1,37.71 | v29.43,33.77 RLY2.P$1
N$22
  Bottom 0.406: Q5.C 34.38,35.43 | 34.38,35.43 D8.A | RLY2.P$3 40.1,33.77 38.45,35.43 34.38,35.43
N$23  (via drill 0.6)
  Top 0.406: 30.57,36.06 31.97,37.46 31.97,40.63 S2.2 | 30.57,36.06 30.57,25.27 31.85,24 v33.37,24 36.8,27.43 v43.4,27.43 | ICSP1.1 14.32,37.59 15.46,38.73 26,38.73 28.67,36.06 30.57,36.06
  Bottom 0.406: IC2.4 v33.37,24 | v43.4,27.43 D12.A
N$24
  Bottom 0.406: R11.2 24.61,38.85 15.72,29.96 ICSP1.4 12.54,29.96 14.32,28.19 18.51,28.19 21.94,24.76 25.88,24.76 27.65,26.54 IC2.7
N$25  (via drill 0.6)
  Top 0.406: v38.7,22.98 50.77,22.98 50.89,23.11 50.89,24.5 49.5,25.9 49.5,34.73 R12.2 v55.47,38.85
  Bottom 0.406: ICSP1.5 18.26,27.43 21.69,24 26.13,24 | IC2.6 27.4,25.27 26.13,24 | 26.13,24 26.13,23.11 26.26,22.98 v38.7,22.98 | v55.47,38.85 R12.2
N$26
  Bottom 0.406: LED3.A 51.4,39.17 R12.1
N$27
  Bottom 0.406: R9.2 24.42,33.99 Q5.B
N$28
  Bottom 0.406: D9.A 64.1,29.84 65.25,28.7 65.88,28.7 F2.2
N$29  (via drill 0.6)
  Top 0.406: USB1.1 46.23,35.46 44.93,34.16 44.93,32.51 43.27,30.85 v43.4,29.96
  Bottom 0.406: 45.43,30.15 R13.2 v43.4,29.96
N$30
  Bottom 0.406: R11.1 26.7,39.17 LED4.A
N$31
  Bottom 0.406: 48.05,25.65 48.05,25.13 Q6.C | Q4.1 R10.1 57.44,26.35 57.37,26.28 55.97,26.28 55.34,25.65 48.05,25.65 | 48.05,25.65 48.05,26.69 D12.C
N$32
  Bottom 0.406: Q6.B 42,23.55 R14.2
N$33
  Bottom 0.406: IN2.2 60.17,62.34 | 60.17,62.34 IN2.2A | R15.1 60.17,62.34
N$34
  Bottom 0.406: Q7.2 R17.2 D15.C
N$35
  Bottom 0.406: F3.1 BATT2.2
N$36
  Bottom 0.406: OUT2.2 OUT2.2A 21.46,64.15 22.07,64.76 32.73,64.76 33.24,64.25 33.24,61.58 36.54,58.28 38.83,58.28 40.23,56.88 46.32,56.88 RLY3.P$4
N$37  (via drill 0.6)
  Top 0.406: v16.1,59.68 25.5,59.68 v29.43,55.74
  Bottom 0.406: OUT2.1 15.11,58.69 v16.1,59.68 | v29.43,55.74 RLY3.P$1
N$38
  Bottom 0.406: Q8.C 34.38,57.39 | 34.38,57.39 D14.A | RLY3.P$3 40.1,55.74 38.45,57.39 34.38,57.39
N$39  (via drill 0.6)
  Top 0.406: 30.57,58.03 31.97,59.42 31.97,62.6 S3.2 | 30.57,58.03 30.57,47.23 31.85,45.96 v33.37,45.96 36.8,49.39 v43.4,49.39 | ICSP2.1 14.32,59.55 15.46,60.69 26,60.69 28.67,58.03 30.57,58.03
  Bottom 0.406: IC3.4 v33.37,45.96 | v43.4,49.39 D18.A
N$40
  Bottom 0.406: R18.2 24.61,60.82 15.72,51.93 ICSP2.4 12.54,51.93 14.32,50.15 18.51,50.15 21.94,46.72 25.88,46.72 27.65,48.5 IC3.7
N$41  (via drill 0.6)
  Top 0.406: v38.7,44.95 50.77,44.95 50.89,45.07 50.89,46.47 49.5,47.87 49.5,56.7 R19.2 v55.47,60.82
  Bottom 0.406: ICSP2.5 18.26,49.39 21.69,45.96 26.13,45.96 | IC3.6 27.4,47.23 26.13,45.96 | 26.13,45.96 26.13,45.07 26.26,44.95 v38.7,44.95 | v55.47,60.82 R19.2
N$42
  Bottom 0.406: LED5.A 51.4,61.14 R19.1
N$43
  Bottom 0.406: R16.2 24.42,55.96 Q8.B
N$44
  Bottom 0.406: D15.A 64.1,51.8 65.25,50.66 65.88,50.66 F3.2
N$45  (via drill 0.6)
  Top 0.406: USB2.1 46.23,57.42 44.93,56.12 44.93,54.47 43.27,52.82 v43.4,51.93
  Bottom 0.406: 45.43,52.12 R20.2 v43.4,51.93
N$46
  Bottom 0.406: R18.1 26.7,61.14 LED6.A
N$47
  Bottom 0.406: 48.05,47.61 48.05,47.09 Q9.C | Q7.1 R17.1 57.44,48.31 57.37,48.25 55.97,48.25 55.34,47.61 48.05,47.61 | 48.05,47.61 48.05,48.66 D18.C
N$48
  Bottom 0.406: Q9.B 42,45.52 R21.2
N$49
  Bottom 0.406: IN3.2 60.17,84.31 | 60.17,84.31 IN3.2A | R22.1 60.17,84.31
N$50
  Bottom 0.406: Q10.2 R24.2 D21.C
N$51
  Bottom 0.406: F4.1 BATT3.2
N$52
  Bottom 0.406: OUT3.2 OUT3.2A 21.46,86.11 22.07,86.72 32.73,86.72 33.24,86.21 33.24,83.55 36.54,80.24 38.83,80.24 40.23,78.85 46.32,78.85 RLY4.P$4
N$53  (via drill 0.6)
  Top 0.406: v16.1,81.64 25.5,81.64 v29.43,77.7
  Bottom 0.406: OUT3.1 15.11,80.65 v16.1,81.64 | v29.43,77.7 RLY4.P$1
N$54
  Bottom 0.406: Q11.C 34.38,79.36 | 34.38,79.36 D20.A | RLY4.P$3 40.1,77.7 38.45,79.36 34.38,79.36
N$55  (via drill 0.6)
  Top 0.406: 30.57,79.99 31.97,81.39 31.97,84.56 S4.2 | 30.57,79.99 30.57,69.19 31.85,67.92 v33.37,67.92 36.8,71.35 v43.4,71.35 | ICSP3.1 14.32,81.51 15.46,82.66 26,82.66 28.67,79.99 30.57,79.99
  Bottom 0.406: IC4.4 v33.37,67.92 | v43.4,71.35 D24.A
N$56
  Bottom 0.406: R25.2 24.61,82.78 15.72,73.89 ICSP3.4 12.54,73.89 14.32,72.12 18.51,72.12 21.94,68.69 25.88,68.69 27.65,70.47 IC4.7
N$57  (via drill 0.6)
  Top 0.406: v38.7,66.91 50.77,66.91 50.89,67.04 50.89,68.43 49.5,69.83 49.5,78.66 R26.2 v55.47,82.78
  Bottom 0.406: ICSP3.5 18.26,71.35 21.69,67.92 26.13,67.92 | IC4.6 27.4,69.19 26.13,67.92 | 26.13,67.92 26.13,67.04 26.26,66.91 v38.7,66.91 | v55.47,82.78 R26.2
N$58
  Bottom 0.406: LED7.A 51.4,83.1 R26.1
N$59
  Bottom 0.406: R23.2 24.42,77.92 Q11.B
N$60
  Bottom 0.406: D21.A 64.1,73.77 65.25,72.62 65.88,72.62 F4.2
N$61  (via drill 0.6)
  Top 0.406: USB3.1 46.23,79.39 44.93,78.08 44.93,76.43 43.27,74.78 v43.4,73.89
  Bottom 0.406: 45.43,74.08 R27.2 v43.4,73.89
N$62
  Bottom 0.406: R25.1 26.7,83.1 LED8.A
N$63
  Bottom 0.406: 48.05,69.58 48.05,69.06 Q12.C | Q10.1 R24.1 57.44,70.28 57.37,70.21 55.97,70.21 55.34,69.58 48.05,69.58 | 48.05,69.58 48.05,70.62 D24.C
N$64
  Bottom 0.406: Q12.B 42,67.48 R28.2
N$65
  Bottom 0.406: IN4.2 119.27,18.41 | 119.27,18.41 IN4.2A | R29.1 119.27,18.41
N$66
  Bottom 0.406: Q13.2 R31.2 D27.C
N$67
  Bottom 0.406: F5.1 BATT4.2
N$68
  Bottom 0.406: OUT4.2 OUT4.2A 80.56,20.22 81.17,20.83 91.84,20.83 92.35,20.32 92.35,17.65 95.65,14.35 97.94,14.35 99.33,12.95 105.43,12.95 RLY5.P$4
N$69  (via drill 0.6)
  Top 0.406: v75.2,15.75 84.6,15.75 v88.54,11.81
  Bottom 0.406: OUT4.1 74.21,14.76 v75.2,15.75 | v88.54,11.81 RLY5.P$1
N$70
  Bottom 0.406: Q14.C 93.49,13.46 | 93.49,13.46 D26.A | RLY5.P$3 99.21,11.81 97.56,13.46 93.49,13.46
N$71  (via drill 0.6)
  Top 0.406: 89.68,14.1 91.08,15.49 91.08,18.67 S5.2 | 89.68,14.1 89.68,3.3 90.95,2.03 v92.48,2.03 95.9,5.46 v102.51,5.46 | ICSP4.1 73.43,15.62 74.57,16.76 85.11,16.76 87.78,14.1 89.68,14.1
  Bottom 0.406: IC5.4 v92.48,2.03 | v102.51,5.46 D30.A
N$72
  Bottom 0.406: R32.2 83.71,16.89 74.82,8 ICSP4.4 71.65,8 73.43,6.22 77.62,6.22 81.05,2.79 84.98,2.79 86.76,4.57 IC5.7
N$73  (via drill 0.6)
  Top 0.406: v97.81,1.02 109.87,1.02 110,1.14 110,2.54 108.6,3.94 108.6,12.77 R33.2 v114.57,16.89
  Bottom 0.406: ICSP4.5 77.36,5.46 80.79,2.03 85.24,2.03 | IC5.6 86.51,3.3 85.24,2.03 | 85.24,2.03 85.24,1.14 85.36,1.02 v97.81,1.02 | v114.57,16.89 R33.2
N$74
  Bottom 0.406: LED9.A 110.51,17.21 R33.1
N$75
  Bottom 0.406: R30.2 83.52,12.03 Q14.B
N$76
  Bottom 0.406: D27.A 123.21,7.87 124.35,6.73 124.99,6.73 F5.2
N$77  (via drill 0.6)
  Top 0.406: USB4.1 105.33,13.49 104.03,12.19 104.03,10.54 102.38,8.89 v102.51,8
  Bottom 0.406: 104.54,8.19 R34.2 v102.51,8
N$78
  Bottom 0.406: R32.1 85.81,17.21 LED10.A
N$79
  Bottom 0.406: 107.15,3.68 107.15,3.16 Q15.C | Q13.1 R31.1 116.54,4.38 116.48,4.32 115.08,4.32 114.45,3.68 107.15,3.68 | 107.15,3.68 107.15,4.73 D30.C
N$80
  Bottom 0.406: Q15.B 101.11,1.59 R35.2
N$81
  Bottom 0.406: IN5.2 119.27,40.38 | 119.27,40.38 IN5.2A | R36.1 119.27,40.38
N$82
  Bottom 0.406: Q16.2 R38.2 D33.C
N$83
  Bottom 0.406: F6.1 BATT5.2
N$84
  Bottom 0.406: OUT5.2 OUT5.2A 80.56,42.18 81.17,42.79 91.84,42.79 92.35,42.28 92.35,39.62 95.65,36.31 97.94,36.31 99.33,34.92 105.43,34.92 RLY6.P$4
N$85  (via drill 0.6)
  Top 0.406: v75.2,37.71 84.6,37.71 v88.54,33.77
  Bottom 0.406: OUT5.1 74.21,36.72 v75.2,37.71 | v88.54,33.77 RLY6.P$1
N$86
  Bottom 0.406: Q17.C 93.49,35.43 | 93.49,35.43 D32.A | RLY6.P$3 99.21,33.77 97.56,35.43 93.49,35.43
N$87  (via drill 0.6)
  Top 0.406: 89.68,36.06 91.08,37.46 91.08,40.63 S6.2 | 89.68,36.06 89.68,25.27 90.95,24 v92.48,24 95.9,27.43 v102.51,27.43 | ICSP5.1 73.43,37.59 74.57,38.73 85.11,38.73 87.78,36.06 89.68,36.06
  Bottom 0.406: IC6.4 v92.48,24 | v102.51,27.43 D36.A
N$88
  Bottom 0.406: R39.2 83.71,38.85 74.82,29.96 ICSP5.4 71.65,29.96 73.43,28.19 77.62,28.19 81.05,24.76 84.98,24.76 86.76,26.54 IC6.7
N$89  (via drill 0.6)
  Top 0.406: v97.81,22.98 109.87,22.98 110,23.11 110,24.5 108.6,25.9 108.6,34.73 R40.2 v114.57,38.85
  Bottom 0.406: ICSP5.5 77.36,27.43 80.79,24 85.24,24 | IC6.6 86.51,25.27 85.24,24 | 85.24,24 85.24,23.11 85.36,22.98 v97.81,22.98 | v114.57,38.85 R40.2
N$90
  Bottom 0.406: LED11.A 110.51,39.17 R40.1
N$91
  Bottom 0.406: R37.2 83.52,33.99 Q17.B
N$92
  Bottom 0.406: D33.A 123.21,29.84 124.35,28.7 124.99,28.7 F6.2
N$93  (via drill 0.6)
  Top 0.406: USB5.1 105.33,35.46 104.03,34.16 104.03,32.51 102.38,30.85 v102.51,29.96
  Bottom 0.406: 104.54,30.15 R41.2 v102.51,29.96
N$94
  Bottom 0.406: R39.1 85.81,39.17 LED12.A
N$95
  Bottom 0.406: 107.15,25.65 107.15,25.13 Q18.C | Q16.1 R38.1 116.54,26.35 116.48,26.28 115.08,26.28 114.45,25.65 107.15,25.65 | 107.15,25.65 107.15,26.69 D36.C
N$96
  Bottom 0.406: Q18.B 101.11,23.55 R42.2
N$97
  Bottom 0.406: IN6.2 119.27,62.34 | 119.27,62.34 IN6.2A | R43.1 119.27,62.34
N$98
  Bottom 0.406: Q19.2 R45.2 D39.C
N$99
  Bottom 0.406: F7.1 BATT6.2
N$100
  Bottom 0.406: OUT6.2 OUT6.2A 80.56,64.15 81.17,64.76 91.84,64.76 92.35,64.25 92.35,61.58 95.65,58.28 97.94,58.28 99.33,56.88 105.43,56.88 RLY7.P$4
N$101  (via drill 0.6)
  Top 0.406: v75.2,59.68 84.6,59.68 v88.54,55.74
  Bottom 0.406: OUT6.1 74.21,58.69 v75.2,59.68 | v88.54,55.74 RLY7.P$1
N$102
  Bottom 0.406: Q20.C 93.49,57.39 | 93.49,57.39 D38.A | RLY7.P$3 99.21,55.74 97.56,57.39 93.49,57.39
N$103  (via drill 0.6)
  Top 0.406: 89.68,58.03 91.08,59.42 91.08,62.6 S7.2 | 89.68,58.03 89.68,47.23 90.95,45.96 v92.48,45.96 95.9,49.39 v102.51,49.39 | ICSP6.1 73.43,59.55 74.57,60.69 85.11,60.69 87.78,58.03 89.68,58.03
  Bottom 0.406: IC7.4 v92.48,45.96 | v102.51,49.39 D42.A
N$104
  Bottom 0.406: R46.2 83.71,60.82 74.82,51.93 ICSP6.4 71.65,51.93 73.43,50.15 77.62,50.15 81.05,46.72 84.98,46.72 86.76,48.5 IC7.7
N$105  (via drill 0.6)
  Top 0.406: v97.81,44.95 109.87,44.95 110,45.07 110,46.47 108.6,47.87 108.6,56.7 R47.2 v114.57,60.82
  Bottom 0.406: ICSP6.5 77.36,49.39 80.79,45.96 85.24,45.96 | IC7.6 86.51,47.23 85.24,45.96 | 85.24,45.96 85.24,45.07 85.36,44.95 v97.81,44.95 | v114.57,60.82 R47.2
N$106
  Bottom 0.406: LED13.A 110.51,61.14 R47.1
N$107
  Bottom 0.406: R44.2 83.52,55.96 Q20.B
N$108
  Bottom 0.406: D39.A 123.21,51.8 124.35,50.66 124.99,50.66 F7.2
N$109  (via drill 0.6)
  Top 0.406: USB6.1 105.33,57.42 104.03,56.12 104.03,54.47 102.38,52.82 v102.51,51.93
  Bottom 0.406: 104.54,52.12 R48.2 v102.51,51.93
N$110
  Bottom 0.406: R46.1 85.81,61.14 LED14.A
N$111
  Bottom 0.406: 107.15,47.61 107.15,47.09 Q21.C | Q19.1 R45.1 116.54,48.31 116.48,48.25 115.08,48.25 114.45,47.61 107.15,47.61 | 107.15,47.61 107.15,48.66 D42.C
N$112
  Bottom 0.406: Q21.B 101.11,45.52 R49.2
N$113
  Bottom 0.406: IN7.2 119.27,84.31 | 119.27,84.31 IN7.2A | R50.1 119.27,84.31
N$114
  Bottom 0.406: Q22.2 R52.2 D45.C
N$115
  Bottom 0.406: F8.1 BATT7.2
N$116
  Bottom 0.406: OUT7.2 OUT7.2A 80.56,86.11 81.17,86.72 91.84,86.72 92.35,86.21 92.35,83.55 95.65,80.24 97.94,80.24 99.33,78.85 105.43,78.85 RLY8.P$4
N$117  (via drill 0.6)
  Top 0.406: v75.2,81.64 84.6,81.64 v88.54,77.7
  Bottom 0.406: OUT7.1 74.21,80.65 v75.2,81.64 | v88.54,77.7 RLY8.P$1
N$118
  Bottom 0.406: Q23.C 93.49,79.36 | 93.49,79.36 D44.A | RLY8.P$3 99.21,77.7 97.56,79.36 93.49,79.36
N$119  (via drill 0.6)
  Top 0.406: 89.68,79.99 91.08,81.39 91.08,84.56 S8.2 | 89.68,79.99 89.68,69.19 90.95,67.92 v92.48,67.92 95.9,71.35 v102.51,71.35 | ICSP7.1 73.43,81.51 74.57,82.66 85.11,82.66 87.78,79.99 89.68,79.99
  Bottom 0.406: IC8.4 v92.48,67.92 | v102.51,71.35 D48.A
N$120
  Bottom 0.406: R53.2 83.71,82.78 74.82,73.89 ICSP7.4 71.65,73.89 73.43,72.12 77.62,72.12 81.05,68.69 84.98,68.69 86.76,70.47 IC8.7
N$121  (via drill 0.6)
  Top 0.406: v97.81,66.91 109.87,66.91 110,67.04 110,68.43 108.6,69.83 108.6,78.66 R54.2 v114.57,82.78
  Bottom 0.406: ICSP7.5 77.36,71.35 80.79,67.92 85.24,67.92 | IC8.6 86.51,69.19 85.24,67.92 | 85.24,67.92 85.24,67.04 85.36,66.91 v97.81,66.91 | v114.57,82.78 R54.2
N$122
  Bottom 0.406: LED15.A 110.51,83.1 R54.1
N$123
  Bottom 0.406: R51.2 83.52,77.92 Q23.B
N$124
  Bottom 0.406: D45.A 123.21,73.77 124.35,72.62 124.99,72.62 F8.2
N$125  (via drill 0.6)
  Top 0.406: USB7.1 105.33,79.39 104.03,78.08 104.03,76.43 102.38,74.78 v102.51,73.89
  Bottom 0.406: 104.54,74.08 R55.2 v102.51,73.89
N$126
  Bottom 0.406: R53.1 85.81,83.1 LED16.A
N$127
  Bottom 0.406: 107.15,69.58 107.15,69.06 Q24.C | Q22.1 R52.1 116.54,70.28 116.48,70.21 115.08,70.21 114.45,69.58 107.15,69.58 | 107.15,69.58 107.15,70.62 D48.C
N$128
  Bottom 0.406: Q24.B 101.11,67.48 R56.2
OUTPUT  (via drill 0.6)
  Top 0.406: v28.16,2.03 v28.16,10.16
  Bottom 0.406: IC1.5 v28.16,2.03 | v28.16,10.16 R5.1
OUTPUT1  (via drill 0.6)
  Top 0.406: v28.16,24 v28.16,32.12
  Bottom 0.406: IC2.5 v28.16,24 | v28.16,32.12 R9.1
OUTPUT2  (via drill 0.6)
  Top 0.406: v28.16,45.96 v28.16,54.09
  Bottom 0.406: IC3.5 v28.16,45.96 | v28.16,54.09 R16.1
OUTPUT3  (via drill 0.6)
  Top 0.406: v28.16,67.92 v28.16,76.05
  Bottom 0.406: IC4.5 v28.16,67.92 | v28.16,76.05 R23.1
OUTPUT4  (via drill 0.6)
  Top 0.406: v87.27,2.03 v87.27,10.16
  Bottom 0.406: IC5.5 v87.27,2.03 | v87.27,10.16 R30.1
OUTPUT5  (via drill 0.6)
  Top 0.406: v87.27,24 v87.27,32.12
  Bottom 0.406: IC6.5 v87.27,24 | v87.27,32.12 R37.1
OUTPUT6  (via drill 0.6)
  Top 0.406: v87.27,45.96 v87.27,54.09
  Bottom 0.406: IC7.5 v87.27,45.96 | v87.27,54.09 R44.1
OUTPUT7  (via drill 0.6)
  Top 0.406: v87.27,67.92 v87.27,76.05
  Bottom 0.406: IC8.5 v87.27,67.92 | v87.27,76.05 R51.1
POWER_CTRL
  Bottom 0.406: IC1.3 38.39,3.3 R7.1
POWER_CTRL1
  Bottom 0.406: IC2.3 38.39,25.27 R14.1
POWER_CTRL2
  Bottom 0.406: IC3.3 38.39,47.23 R21.1
POWER_CTRL3
  Bottom 0.406: IC4.3 38.39,69.19 R28.1
POWER_CTRL4
  Bottom 0.406: IC5.3 97.49,3.3 R35.1
POWER_CTRL5
  Bottom 0.406: IC6.3 97.49,25.27 R42.1
POWER_CTRL6
  Bottom 0.406: IC7.3 97.49,47.23 R49.1
POWER_CTRL7
  Bottom 0.406: IC8.3 97.49,69.19 R56.1
USB_POWER  (via drill 0.6)
  Top 0.406: v48.61,8 48.61,3.17 v49.75,2.03
  Bottom 0.406: D2.A v49.75,2.03 | v48.61,8 R4.1
USB_POWER1  (via drill 0.6)
  Top 0.406: v48.61,29.96 48.61,25.14 v49.75,24
  Bottom 0.406: D11.A v49.75,24 | v48.61,29.96 R13.1
USB_POWER2  (via drill 0.6)
  Top 0.406: v48.61,51.93 48.61,47.1 v49.75,45.96
  Bottom 0.406: D17.A v49.75,45.96 | v48.61,51.93 R20.1
USB_POWER3  (via drill 0.6)
  Top 0.406: v48.61,73.89 48.61,69.07 v49.75,67.92
  Bottom 0.406: D23.A v49.75,67.92 | v48.61,73.89 R27.1
USB_POWER4  (via drill 0.6)
  Top 0.406: v107.72,8 107.72,3.17 v108.86,2.03
  Bottom 0.406: D29.A v108.86,2.03 | v107.72,8 R34.1
USB_POWER5  (via drill 0.6)
  Top 0.406: v107.72,29.96 107.72,25.14 v108.86,24
  Bottom 0.406: D35.A v108.86,24 | v107.72,29.96 R41.1
USB_POWER6  (via drill 0.6)
  Top 0.406: v107.72,51.93 107.72,47.1 v108.86,45.96
  Bottom 0.406: D41.A v108.86,45.96 | v107.72,51.93 R48.1
USB_POWER7  (via drill 0.6)
  Top 0.406: v107.72,73.89 107.72,69.07 v108.86,67.92
  Bottom 0.406: D47.A v108.86,67.92 | v107.72,73.89 R55.1
VCC  (via drill 0.6)
  Top 0.406: C2.+ 54.07,10.79 56.36,8.51 56.36,1.67 v56.48,1.54 | v35.53,8 35.53,8.26 37.31,10.03 RLY1.P$2 | ICSP.2 15.21,13.08 17.11,14.99 24.86,14.99 v28.16,11.68
  Bottom 0.406: D2.C 55.52,1.54 v56.48,1.54 Q1.3 | IC1.1 35.53,5.89 v35.53,8 | v28.16,11.68 29.43,10.41 31.97,10.41 33.75,8.64 33.75,8.06 C1.1 v35.53,8 | C2.+ 54.07,11.05 53.05,10.03 37.56,10.03 v35.53,8
VCC1  (via drill 0.6)
  Top 0.406: C4.+ 54.07,32.76 56.36,30.47 56.36,23.63 v56.48,23.5 | v35.53,29.96 35.53,30.22 37.31,32 RLY2.P$2 | ICSP1.2 15.21,35.05 17.11,36.95 24.86,36.95 v28.16,33.65
  Bottom 0.406: D11.C 55.52,23.5 v56.48,23.5 Q4.3 | IC2.1 35.53,27.86 v35.53,29.96 | v28.16,33.65 29.43,32.38 31.97,32.38 33.75,30.6 33.75,30.03 C3.1 v35.53,29.96 | C4.+ 54.07,33.01 53.05,32 37.56,32 v35.53,29.96
VCC2  (via drill 0.6)
  Top 0.406: C6.+ 54.07,54.72 56.36,52.44 56.36,45.6 v56.48,45.47 | v35.53,51.93 35.53,52.18 37.31,53.96 RLY3.P$2 | ICSP2.2 15.21,57.01 17.11,58.91 24.86,58.91 v28.16,55.61
  Bottom 0.406: D17.C 55.52,45.47 v56.48,45.47 Q7.3 | IC3.1 35.53,49.82 v35.53,51.93 | v28.16,55.61 29.43,54.34 31.97,54.34 33.75,52.56 33.75,51.99 C5.1 v35.53,51.93 | C6.+ 54.07,54.98 53.05,53.96 37.56,53.96 v35.53,51.93
VCC3  (via drill 0.6)
  Top 0.406: C8.+ 54.07,76.69 56.36,74.4 56.36,67.56 v56.48,67.43 | v35.53,73.89 35.53,74.15 37.31,75.93 RLY4.P$2 | ICSP3.2 15.21,78.97 17.11,80.88 24.86,80.88 v28.16,77.58
  Bottom 0.406: D23.C 55.52,67.43 v56.48,67.43 Q10.3 | IC4.1 35.53,71.79 v35.53,73.89 | v28.16,77.58 29.43,76.31 31.97,76.31 33.75,74.53 33.75,73.95 C7.1 v35.53,73.89 | C8.+ 54.07,76.94 53.05,75.93 37.56,75.93 v35.53,73.89
VCC4  (via drill 0.6)
  Top 0.406: C10.+ 113.18,10.79 115.46,8.51 115.46,1.67 v115.59,1.54 | v94.63,8 94.63,8.26 96.41,10.03 RLY5.P$2 | ICSP4.2 74.31,13.08 76.22,14.99 83.97,14.99 v87.27,11.68
  Bottom 0.406: D29.C 114.63,1.54 v115.59,1.54 Q13.3 | IC5.1 94.63,5.89 v94.63,8 | v87.27,11.68 88.54,10.41 91.08,10.41 92.86,8.64 92.86,8.06 C9.1 v94.63,8 | C10.+ 113.18,11.05 112.16,10.03 96.67,10.03 v94.63,8
VCC5  (via drill 0.6)
  Top 0.406: C12.+ 113.18,32.76 115.46,30.47 115.46,23.63 v115.59,23.5 | v94.63,29.96 94.63,30.22 96.41,32 RLY6.P$2 | ICSP5.2 74.31,35.05 76.22,36.95 83.97,36.95 v87.27,33.65
  Bottom 0.406: D35.C 114.63,23.5 v115.59,23.5 Q16.3 | IC6.1 94.63,27.86 v94.63,29.96 | v87.27,33.65 88.54,32.38 91.08,32.38 92.86,30.6 92.86,30.03 C11.1 v94.63,29.96 | C12.+ 113.18,33.01 112.16,32 96.67,32 v94.63,29.96
VCC6  (via drill 0.6)
  Top 0.406: C14.+ 113.18,54.72 115.46,52.44 115.46,45.6 v115.59,45.47 | v94.63,51.93 94.63,52.18 96.41,53.96 RLY7.P$2 | ICSP6.2 74.31,57.01 76.22,58.91 83.97,58.91 v87.27,55.61
  Bottom 0.406: D41.C 114.63,45.47 v115.59,45.47 Q19.3 | IC7.1 94.63,49.82 v94.63,51.93 | v87.27,55.61 88.54,54.34 91.08,54.34 92.86,52.56 92.86,51.99 C13.1 v94.63,51.93 | C14.+ 113.18,54.98 112.16,53.96 96.67,53.96 v94.63,51.93
VCC7  (via drill 0.6)
  Top 0.406: C16.+ 113.18,76.69 115.46,74.4 115.46,67.56 v115.59,67.43 | v94.63,73.89 94.63,74.15 96.41,75.93 RLY8.P$2 | ICSP7.2 74.31,78.97 76.22,80.88 83.97,80.88 v87.27,77.58
  Bottom 0.406: D47.C 114.63,67.43 v115.59,67.43 Q22.3 | IC8.1 94.63,71.79 v94.63,73.89 | v87.27,77.58 88.54,76.31 91.08,76.31 92.86,74.53 92.86,73.95 C15.1 v94.63,73.89 | C16.+ 113.18,76.94 112.16,75.93 96.67,75.93 v94.63,73.89
Z
  Bottom 0.406: D4.A D5.A 41.11,8.25 42.26,9.4 53.43,9.4 59.28,15.24 60.1,15.24 R1.2
Z1
  Bottom 0.406: D10.A D7.A 41.11,30.21 42.26,31.36 53.43,31.36 59.28,37.2 60.1,37.2 R8.2
Z2
  Bottom 0.406: D16.A D13.A 41.11,52.18 42.26,53.33 53.43,53.33 59.28,59.17 60.1,59.17 R15.2
Z3
  Bottom 0.406: D22.A D19.A 41.11,74.14 42.26,75.29 53.43,75.29 59.28,81.13 60.1,81.13 R22.2
Z4
  Bottom 0.406: D28.A D25.A 100.21,8.25 101.37,9.4 112.54,9.4 118.38,15.24 119.21,15.24 R29.2
Z5
  Bottom 0.406: D34.A D31.A 100.21,30.21 101.37,31.36 112.54,31.36 118.38,37.2 119.21,37.2 R36.2
Z6
  Bottom 0.406: D40.A D37.A 100.21,52.18 101.37,53.33 112.54,53.33 118.38,59.17 119.21,59.17 R43.2
Z7
  Bottom 0.406: D46.A D43.A 100.21,74.14 101.37,75.29 112.54,75.29 118.38,81.13 119.21,81.13 R50.2

## Text on the board
tDocu: USB / PWR | USB / PWR | - | - | + | + | Latchbox | Latchbox | sixty four pixels | sixty four pixels | oneswitch.org.uk | oneswitch.org.uk | pcb rev 4 | pcb rev 4 | USB / PWR | USB / PWR | - | - | + | + | Latchbox | Latchbox | sixty four pixels | sixty four pixels | oneswitch.org.uk | oneswitch.org.uk | pcb rev 4 | pcb rev 4 | USB / PWR | USB / PWR | - | - | + | + | Latchbox | Latchbox | sixty four pixels | sixty four pixels | oneswitch.org.uk | oneswitch.org.uk | pcb rev 4 | pcb rev 4 | USB / PWR | USB / PWR | - | - | + | + | Latchbox | Latchbox | sixty four pixels | sixty four pixels | oneswitch.org.uk | oneswitch.org.uk | pcb rev 4 | pcb rev 4
_tPlace: RLY1 | RLY1 | OUT | IN | OUT | IN | RLY1 | RLY1 | OUT | IN | OUT | IN | RLY1 | RLY1 | OUT | IN | OUT | IN | RLY1 | RLY1 | OUT | IN | OUT | IN
_bPlace: D6 | D6 | D5 | D5 | D4 | D4 | D3 | D3 | D6 | D6 | D5 | D5 | D4 | D4 | D3 | D3 | D6 | D6 | D5 | D5 | D4 | D3 | D4 | D3 | D6 | D6 | D5 | D5 | D4 | D3 | D4 | D3
_tNames: LED1 | S1 | LED1 | S1 | LED2 | LED2 | C2 | C2 | BATT | BATT | ICSP | ICSP | LED1 | S1 | LED1 | S1 | LED2 | LED2 | C2 | C2 | BATT | BATT | ICSP | ICSP | LED1 | S1 | LED1 | S1 | LED2 | LED2 | C2 | C2 | BATT | BATT | ICSP | ICSP | LED1 | S1 | LED1 | S1 | LED2 | LED2 | C2 | C2 | BATT | BATT | ICSP | ICSP
_bNames: R6 | R6 | R1 | R1 | R2 | R2 | Q2 | Q2 | R4 | R4 | R5 | C1 | D1 | R5 | C1 | D1 | R3 | R3 | Q1 | F1 | Q1 | F1 | D2 | D2 | IC1 | R7 | IC1 | R7 | Q3 | Q3 | R6 | R6 | R1 | R1 | R2 | R2 | Q2 | Q2 | R4 | R4 | R5 | C1 | D1 | R5 | C1 | D1 | R3 | R3 | Q1 | F1 | Q1 | F1 | D2 | D2 | IC1 | R7 | IC1 | R7 | Q3 | Q3 | R6 | R6 | R1 | R1 | R2 | R2 | Q2 | Q2 | R4 | R4 | R5 | C1 | D1 | R5 | C1 | D1 | R3 | R3 | Q1 | F1 | Q1 | F1 | D2 | D2 | IC1 | R7 | IC1 | R7 | Q3 | Q3 | R6 | R6 | R1 | R1 | R2 | R2 | Q2 | Q2 | R4 | R4 | R5 | C1 | D1 | R5 | C1 | D1 | R3 | R3 | Q1 | F1 | Q1 | F1 | D2 | D2 | IC1 | R7 | Q3 | IC1 | R7 | Q3